# EAGLE board 12v_3A (EAGLE 5.06)
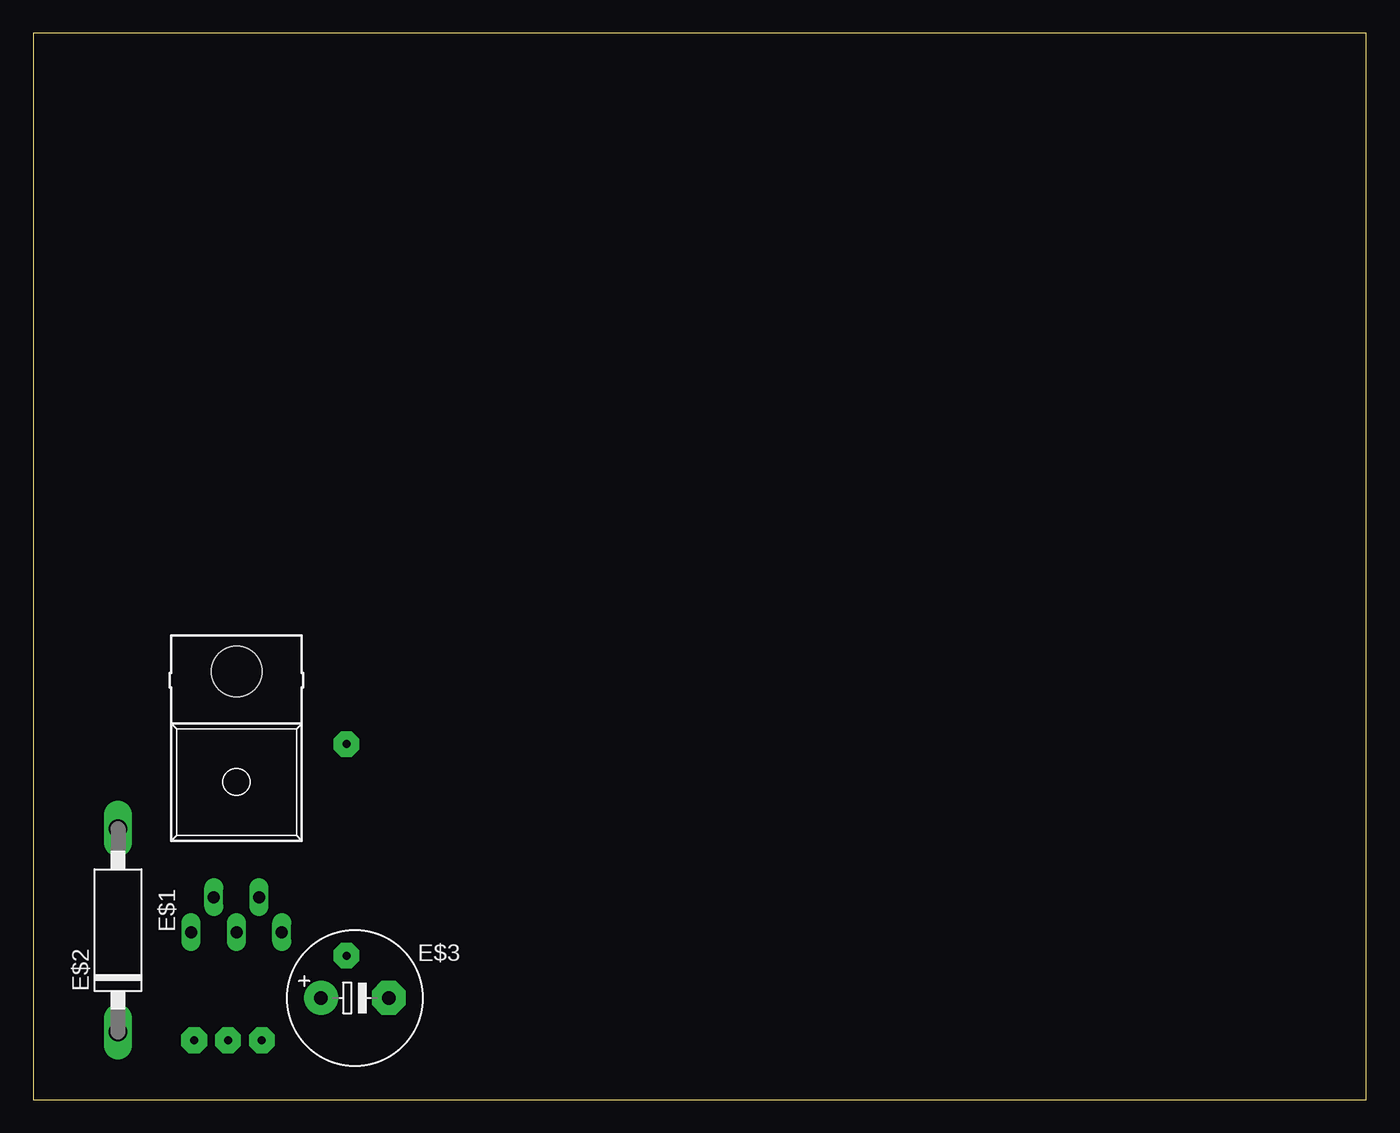
[diagram p0: board, top side]
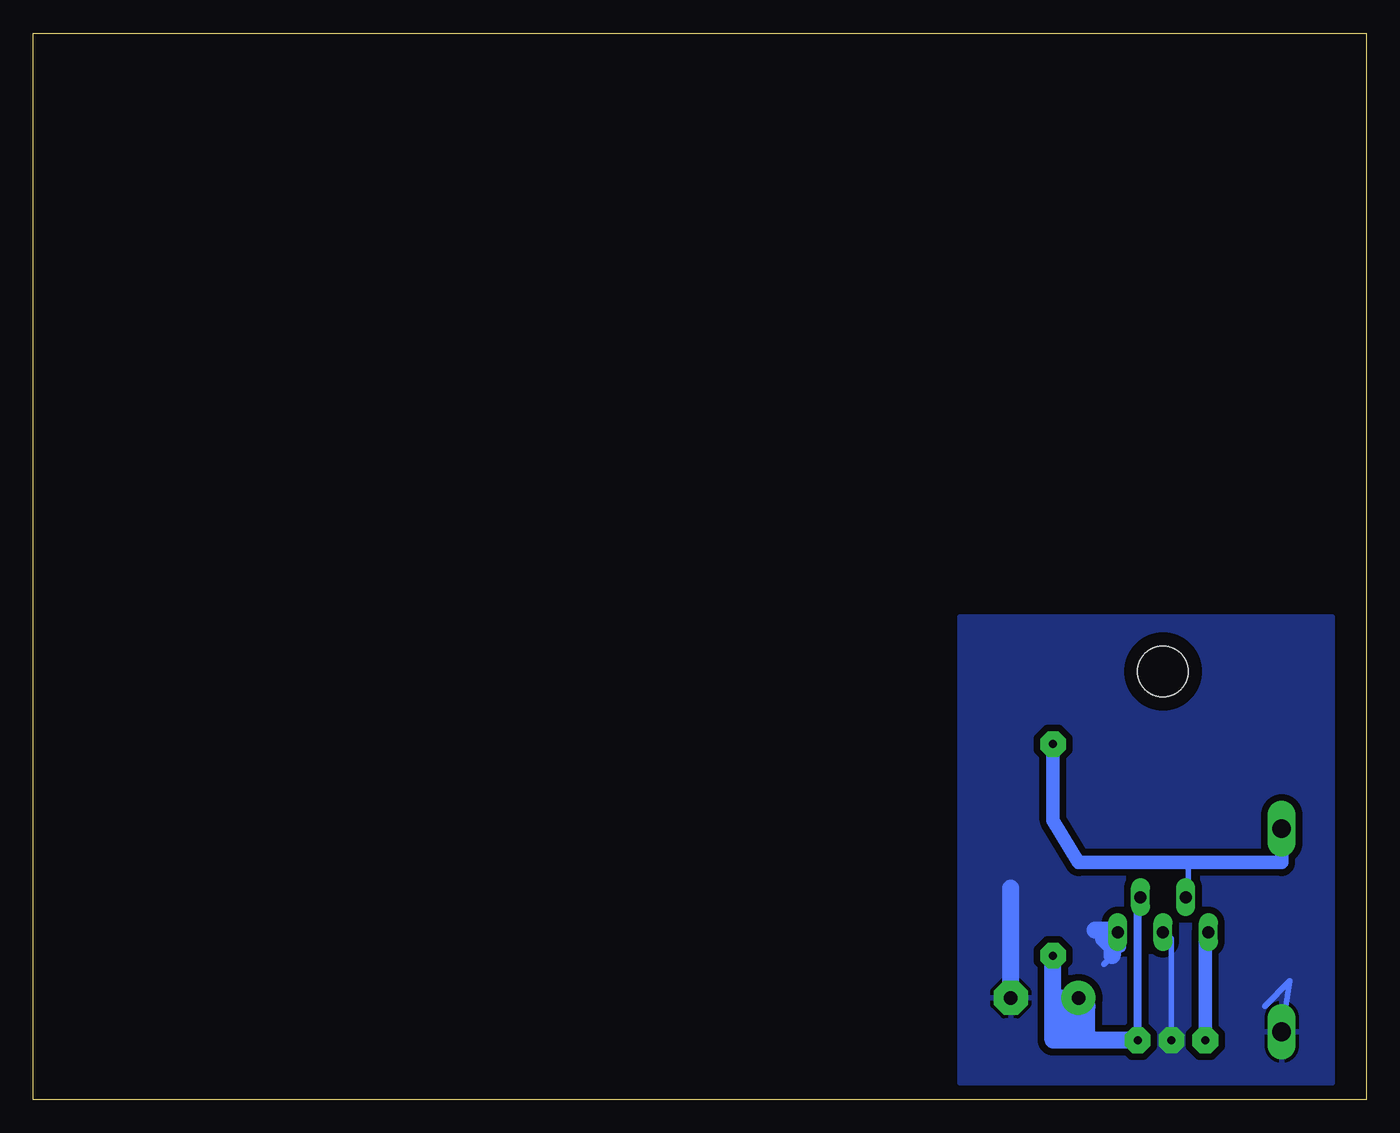
[diagram p1: board, bottom side, seen from below]

Size 100 x 80 mm. Coordinates in mm from the lower left corner, seen from the top.
Outline: 0,0 100,0 100,80 0,80 0,0
Copper layers (1*16): Top 0.035mm / dielectric 1.5mm / Bottom 0.035mm
Design rules "default *": minimum track width 10mil, minimum drill 24mil, track to track 20mil, track to pad 20mil, pad to pad 8mil, via to via 8mil, smd to smd 8mil, copper to edge 40mil, drill to drill 8mil, minimum pad ring 10mil, minimum via ring 8mil, stop-mask expansion 4mil, vias tented up to drill 0mil, thermal gap 10mil

## Footprints (pad centres in the part's own frame; a part is rotated, then mirrored left to right if it is on the bottom)
TO220512 = drill 0.9 long: 1 -3.4,-22.37; 2 -1.7,-19.74; 3 0,-22.37; 4 1.7,-19.74; 5 3.4,-22.37 | hole 3.8: 0,-2.8
C1702-15 = drill 1.397 long: A 7.62,0; C -7.62,0
E5-10,5 = drill 1.016 pad 2.54 round: + -2.54,0 | drill 1.016 pad 2.54 octagon: - 2.54,0

## Placement (x,y rotation side)
E$1  [TO220512]  15.24,34.92 0 top
E$2  [C1702-15]  6.35,12.7 90 top
E$3  [E5-10,5]  24.13,7.62 0 top

## Library data of the parts
E$1 = ref-packages
E$2 = diode
E$3 = rcl

## Nets
GND: E$2.C E$3.-
S$2: E$3.+
S$5: E$2.A

## Tracks (layer width: path | path; a pad name or v marks a point on that pad's centre or on a via)
GND  (via drill 0.6 pad 1.93)
  Bottom 0.406: 18.41,11.43 19.05,10.79 19.68,10.16 | v14.61,4.45 14.61,12.06 15.24,12.7 | E$2.C 5.71,8.89 7.62,6.99
  Bottom 0.813: 18.41,11.43 18.41,12.7
  Bottom 1.27: E$3.- 26.67,15.88 | 20.32,12.7 19.05,12.7 19.05,10.79 19.05,11.43 19.68,12.06
  pour Bottom: 2.54,36.2 2.54,1.27 30.48,1.27 30.48,36.2
N$1  (via drill 0.6 pad 1.93)
  Bottom 1.016: v12.06,4.45 12.06,12.7
S$2  (via drill 0.6 pad 1.93)
  Bottom 0.61: v17.14,4.45 17.14,15.24
  Bottom 1.27: 23.5,7.62 v23.5,10.79 | v17.14,4.45 20.95,4.45 | 20.95,4.45 20.95,6.99 | 20.95,4.45 23.5,4.45 23.5,7.62 | 23.5,7.62 E$3.+ 20.95,6.99 | 20.95,6.99 22.86,6.99 22.86,6.35 | 22.86,6.35 22.86,5.71 | 22.86,5.71 22.86,5.08 22.23,5.08 21.59,5.71 22.23,6.35 | 22.86,5.71 22.23,6.35 | 22.86,5.71 22.23,5.71 | 22.23,5.71 21.59,5.08 | 22.23,6.35 21.59,6.35 | 22.86,6.35 22.23,6.35 | 22.86,6.35 22.23,5.71
S$4  (via drill 0.6 pad 1.93)
  other vias: 23.5,26.67
S$5
  Bottom 0.406: 13.34,17.78 13.34,15.24
  Bottom 1.016: E$2.A 6.35,17.78 13.34,17.78 21.59,17.78 23.5,20.95 23.5,26.04